# Altium PCB MB525.PCBDOC (part 3 of 3)
Units mil, origin at the board's own origin, x right, y up, seen from the top; angles counter-clockwise.
Board outline 4505 x 6805 mil, 4 copper layers (TopLayer, GND, VCC, BottomLayer); 281 components, 230 nets, 1107 pads, 580 vias.
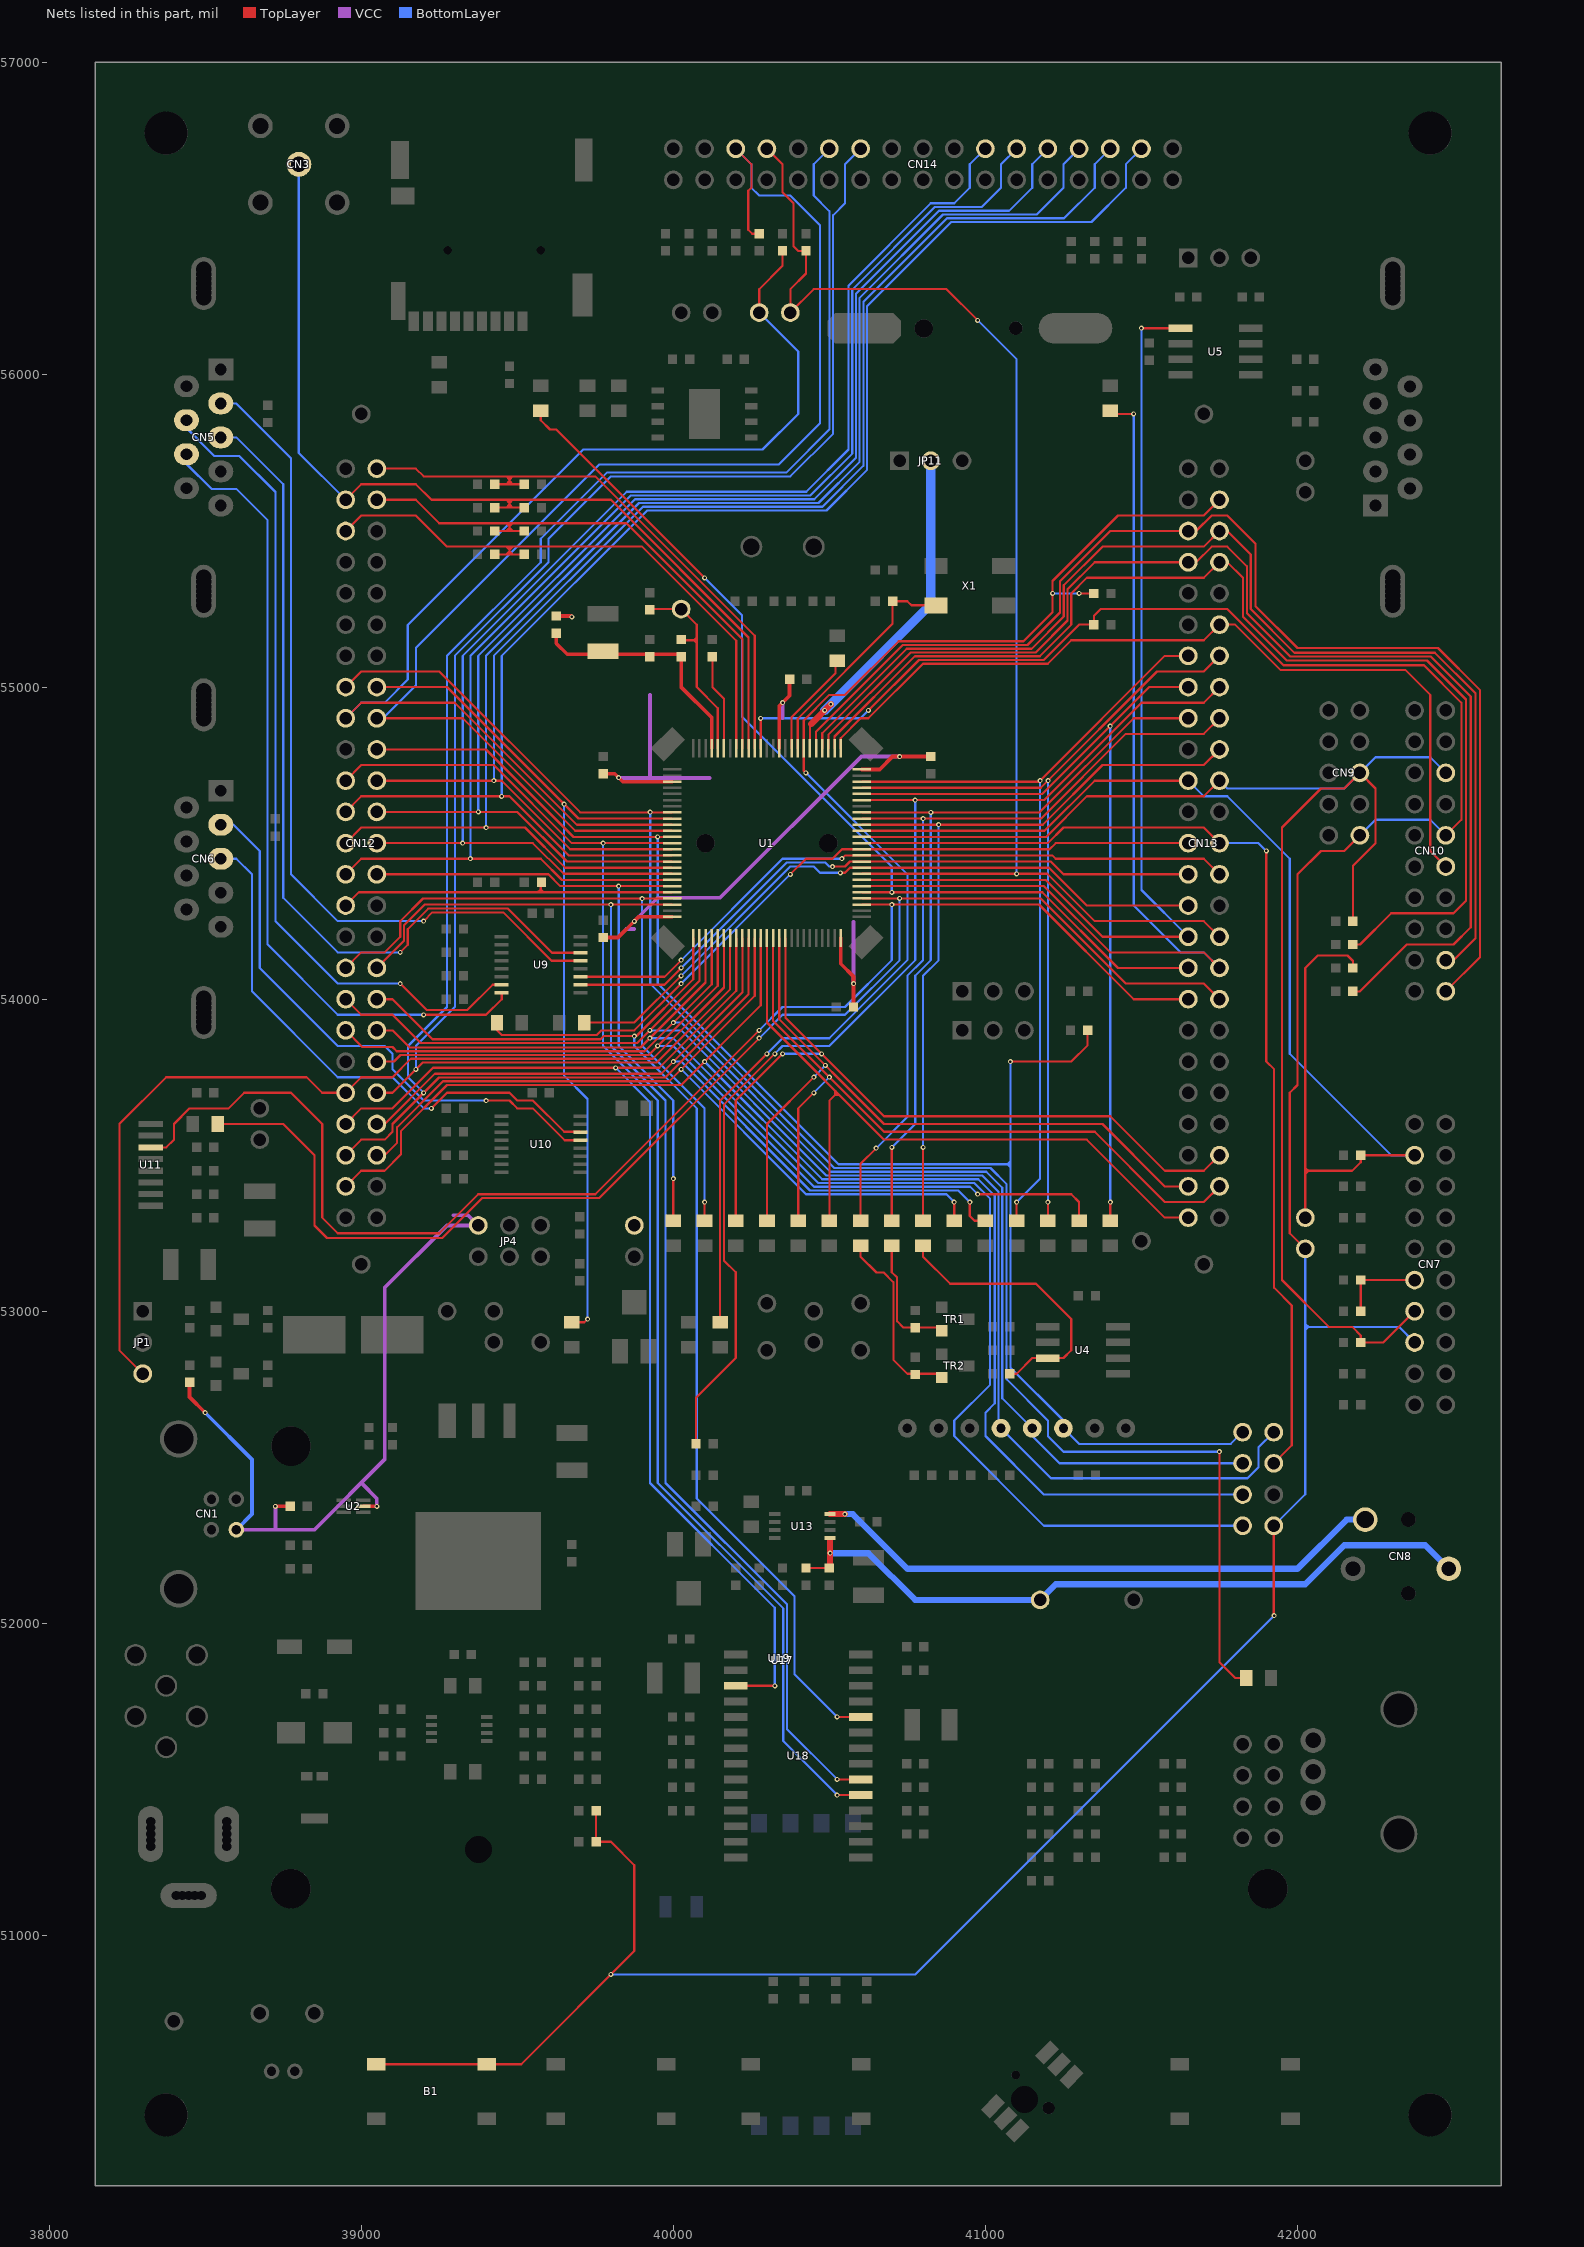
[diagram p5: the nets of this part, all layers, seen from the top]

## Via types
v1: diameter 16, hole 8, TopLayer to BottomLayer, 577 vias
v2: diameter 50, hole 28, TopLayer to BottomLayer, 3 vias

## Nets (pads, with @x,y where several pads share a name; then routed paths per layer and width w, separated by ;. In a path a pad name is that pad's centre, name@x,y a point inside that pad or via, vN(x,y) a via of type N, cw(c..) or ccw(c..) an arc to the next point about the centre after c; other vN are vias at no path point) (continued)
PB0: C76.2 CN12.17 JP8.2 U1.35 | length 3790.2
  TopLayer w7: CN12.17@38950,54900 39000,54950 39300,54950 39690.94,54559.06 U1.35@39995.87,54559.06 ; JP8.2@40275,56200 40275,56275 40350,56350 C76.2@40350,56397.5
  BottomLayer w7: CN12.17@38950,54900 39000,54950 39075,54950 39149,55024 39149,55199 39711,55761 40286,55761 40400,55875 40400,56075 JP8.2@40275,56200
PB1: C72.2 CN12.18 CN14.29 U1.36 | length 4352.4
  TopLayer w7: CN12.18@39050,54900 39325,54900 39685.63,54539.37 U1.36@39995.87,54539.37 ; CN14.29@40200,56725 40250,56675 40250,56600 40240,56590 40240,56465 40252.5,56452.5 C72.2@40275,56452.5
  BottomLayer w7: CN12.18@39050,54900 39070,54900 39175,55005 39175,55125 39763,55713 40338,55713 40470,55845 40470,56480 40375,56575 40275,56575 40250,56600 40250,56675 CN14.29@40200,56725
PB2: CN12.20 R86.1 U1.37 U17.1 U19.6 | length 5100.6
  TopLayer w7: CN12.20@39050,54800 39400,54800 39680.32,54519.68 U1.37@39995.87,54519.68 U1.37@39995.55,54520 ; v1(41080,53800) 41275,53800 41327.5,53852.5 R86.1@41327.5,53900
  BottomLayer w7: v1(39950,54520) 39950,54050 40529,53471 41079,53471 ; 41070,53471 41080,53461 ; 41071,53471 41080,53480 ; v1(41080,53800) 41080,52820 41250,52650 U19.6@41250,52625 41300,52575 41786.22,52575 U17.1@41823.94,52612.72
PB3: CN7.13 CN9.6 CN10.6 CN13.22 R103.1 R129.2 U1.89 | length 4878.7
  TopLayer w7: U1.89@40604.13,54519.68 41194.68,54519.68 41325,54650 41700,54650 CN13.22@41750,54700 ; R129.2@42177.5,54250 42177.5,54427.5 42250,54500 42250,54675 CN9.6@42200,54725 42150,54675 42075,54675 41950,54550 41950,53100 42100,52950 42175,52950 42202.5,52922.5 R103.1@42202.5,52900 42275,52900 CN7.13@42375,53000
  BottomLayer w7: CN13.22@41750,54700 41775,54675 42150,54675 42250,54775 42425,54775 CN10.6@42475,54725
PB4: CN7.3 CN13.21 JP10.1 R122.1 R130.2 U1.90 | length 4136.6
  TopLayer w7: U1.90@40604.13,54539.37 41189.37,54539.37 41350,54700 CN13.21@41675,54700 ; JP10.1@42025,53300 42025,54100 42065,54140 42160,54140 42177.5,54122.5 R130.2@42177.5,54100 ; 42025,53440 42035,53450 42025,53460 ; 42025,53450 42175,53450 42202.5,53477.5 R122.1@42202.5,53500 CN7.3@42375,53500
  BottomLayer w7: CN13.21@41650,54700 41700,54650 41775,54650 41975,54450 41975,53825 42300,53500 CN7.3@42375,53500
PB5: CN13.20 R112.2 U1.91 | length 2535.4
  TopLayer w7: U1.91@40604.13,54559.06 41184.06,54559.06 41375,54750 41700,54750 CN13.20@41750,54800 ; R112.2@40800,53290 v1(40800,53525)
  BottomLayer w7: v1(40800,53525) 40800,54075 40850,54125 v1(40850,54559.06)
PB6: CN13.18 R113.2 U1.92 | length 2650.5
  TopLayer w7: R113.2@40600,53290 40600,53472.72 v1(40650,53522.72) ; U1.92@40604.13,54578.74 41178.74,54578.74 41450,54850 41700,54850 CN13.18@41750,54900
  BottomLayer w7: v1(40650,53522.72) 40750,53622.72 40750,54075 40800,54125 v1(40800,54578.74)
PB7: CN13.17 R114.2 U1.93 | length 2531
  TopLayer w7: U1.93@40604.13,54598.43 41173.43,54598.43 41475,54900 CN13.17@41650,54900 ; R114.2@40700,53290 v1(40700,53525)
  BottomLayer w7: v1(40700,53525) 40775,53600 40775,54075 40825,54125 v1(40825,54598.43)
PB8: CN13.16 R32.1 U1.95 | length 3769
  TopLayer w7: R32.1@40072.5,52575 40072.5,52722.5 40200,52850 40200,53124.7 40162,53162.7 40162,53662 v1(40325,53825) ; U1.95@40604.13,54637.8 41187.8,54637.8 41500,54950 41700,54950 CN13.16@41750,55000
  BottomLayer w7: v1(40325,53825) 40350,53850 40500,53850 40775,54125 v1(40775,54637.8)
PB9: CN13.15 R78.2 U1.96 | length 2772.7
  TopLayer w7: U1.96@40604.13,54657.48 41182.48,54657.48 41525,55000 CN13.15@41650,55000 ; R78.2@41400,53290 v1(41400,53350)
  BottomLayer w7: v1(41399.92,54874.92) 41400,54874.83 v1(41400,53350)
PB10: CN12.33 R115.2 U1.47 | length 2282.9
  TopLayer w7: CN12.33@38950,54100 39000,54150 39075,54150 39125,54200 39125,54250 39197.83,54322.83 39899.69,54322.83 v1(39900,54322.52) ; v1@39900,54322.83 U1.47@39995.87,54322.83 ; R115.2@40100,53290 v1(40100,53350)
  BottomLayer w7: v1(39900,54322.52) 39900,53850 40100,53650 v1(40100,53350)
PB11: CN12.34 U1.48 U18.20 | length 4239.6
  TopLayer w7: CN12.34@39050,54100 39137,54187 39137,54237 39203.15,54303.15 U1.48@39995.87,54303.15 ; v1(40525,51500) U18.20@40600,51500
  BottomLayer w7: v1@39800,54305 39800,53850 39975,53675 39975,52450 40364,52061 40364,51661 v1(40525,51500)
  other v1: 39800,54303.15
PB12: CN12.36 U1.51 U18.24 | length 3804.7
  TopLayer w7: CN12.36@39050,54000 39100,54000 39228.49,53871.51 39766.51,53871.51 39776.78,53881.78 39881.78,53881.78 40063.78,54063.78 U1.51@40063.78,54195.87 ; v1(40525,51700) U18.24@40600,51700
  BottomLayer w7: v1(39875,53881.78) 39875,53850 40075,53650 40075,52400 40388,52087 40388,51837 v1(40525,51700)
PB13: CN12.35 U1.52 U17.2 U19.4 | length 4542.7
  TopLayer w7: CN12.35@38950,54000 39000,53950 39100,53950 39190.49,53859.51 39884.51,53859.51 40083.46,54058.46 U1.52@40083.46,54195.87
  BottomLayer w7: v1(39925,53900) 40025,53900 40490,53435 40990,53435 41042,53383 41042,52633 41210,52465 41840,52465 41875,52500 41875,52563.78 U17.2@41923.94,52612.72
PB14: CN12.38 U1.53 U17.7 | length 4458.8
  TopLayer w7: CN12.38@39050,53900 39100,53900 39155,53845 39895,53845 40103.15,54053.15 U1.53@40103.15,54195.87
  BottomLayer w7: v1(39925,53875) 40000,53875 40464,53411 40964,53411 41015,53360 41015,52765 40900,52650 40900,52600 41187.28,52312.72 U17.7@41823.94,52312.72
PB15: CN12.37 U1.54 U17.3 U19.5 | length 4256.6
  TopLayer w7: CN12.37@38950,53900 39003,53847 39100,53847 39114,53833 39908,53833 40122.83,54047.83 U1.54@40122.83,54195.87
  BottomLayer w7: v1(40000,53925) 40025,53925 40503,53447 41003,53447 41054,53396 41054,52721 U19.5@41150,52625 41150,52600 41237.28,52512.72 U17.3@41823.94,52512.72
PC0: C51.2 CN12.2 R56.2 U1.15 | length 1969.3
  TopLayer w7: CN12.2@39050,55700 39175,55700 39200,55675 39750,55675 40260.63,55164.37 U1.15@40260.63,54804.13 ; C51.2@39427.5,55650 R56.2@39522.5,55650 ; 39465,55650 39475,55660 39485,55650 ; 39465,55675 39475,55665 39485,55675 ; 39475,55650 39475,55675
PC1: C50.2 CN3.5 CN12.3 R55.1 U1.16 | length 3183.6
  TopLayer w7: CN12.3@38950,55600 39000,55650 39175,55650 39225,55600 39800,55600 40240.94,55159.06 U1.16@40240.94,54804.13 ; C50.2@39427.5,55575 R55.1@39522.5,55575 ; 39465,55575 39475,55585 39485,55575 ; 39465,55600 39475,55590 39485,55600 ; 39475,55575 39475,55600
  BottomLayer w7: CN3.5@38800,56675 38800,55750 CN12.3@38950,55600
PC2: C52.2 CN12.4 R57.1 U1.17 | length 1882.3
  TopLayer w7: CN12.4@39050,55600 39175,55600 39250,55525 39850,55525 40221.26,55153.74 U1.17@40221.26,54804.13 ; C52.2@39427.5,55500 R57.1@39522.5,55500 ; 39465,55500 39475,55510 39485,55500 ; 39465,55525 39475,55515 39485,55525 ; 39475,55500 39475,55525
PC3: C53.2 CN12.5 R58.1 U1.18 | length 1959.5
  TopLayer w7: CN12.5@38950,55500 39000,55550 39175,55550 39275,55450 39900,55450 40201.57,55148.43 U1.18@40201.57,54804.13 ; C53.2@39427.5,55425 R58.1@39522.5,55425 ; 39465,55425 39475,55435 39485,55425 ; 39465,55450 39475,55440 39485,55450 ; 39475,55425 39475,55450
PC4: CN12.15 R80.1 U1.33 | length 5424.6
  TopLayer w7: CN12.15@38950,55000 39000,55050 39250,55050 39701.57,54598.43 U1.33@39995.87,54598.43 ; v1(41750,52550) 41750,51875 41800,51825 R80.1@41835,51825
  BottomLayer w7: v1(39926.02,54598.98) 39926.02,54048.98 40516,53459 41016,53459 41068,53407 41068,52782 41200,52650 41200,52600 41250,52550 v1(41750,52550)
PC5: CN12.16 R71.1 U1.34 | length 2855.6
  TopLayer w7: CN12.16@39050,55000 39275,55000 39696.26,54578.74 U1.34@39995.87,54578.74 ; R71.1@39675,52965 39715,52965 v1(39725,52975)
  BottomLayer w7: v1(39650,54625) 39650,53755 39725,53680 v1(39725,52975)
PC6: CN13.49 R8.2 U1.63 | length 2328.8
  TopLayer w7: U1.63@40300,54195.87 40300,53925 40675,53550 41325,53550 41575,53300 CN13.49@41650,53300 ; R8.2@40500,53290 40500,53674.43 40525.29,53699.71 ; 40518.01,53706.99 40518.01,53692.44 40518.8,53693.22 40531.78,53693.22 ; 40519.34,53705.66 40519.38,53705.62 ; 40531.82,53693.18 40531.85,53693.15 40531.78,53693.22
PC7: CN13.48 R7.2 U1.64 | length 2458.4
  TopLayer w7: U1.64@40319.69,54195.87 40319.69,53930.31 40675,53575 41350,53575 41575,53350 41700,53350 CN13.48@41750,53400 ; R7.2@40400,53290 40400,53650 v1(40450,53700)
  BottomLayer w7: v1(40450,53700) v1(40500,53750)
PC8: CN13.47 R6.2 U1.65 | length 2368.1
  TopLayer w7: R6.2@40300,53290 40300,53600 v1(40450,53750) ; U1.65@40339.37,54195.87 40339.37,53935.63 40675,53600 41375,53600 41575,53400 CN13.47@41650,53400
  BottomLayer w7: v1(40450,53750) 40487.17,53787.17 v1(40487.17,53787.83)
PC9: CN13.46 R5.2 U1.66 | length 2592.1
  TopLayer w7: R5.2@40200,53290 40200,53675 v1(40350,53825) ; U1.66@40359.06,54195.87 40359.06,53940.94 40675,53625 41400,53625 41575,53450 41700,53450 CN13.46@41750,53500
  BottomLayer w7: v1(40350,53825) v1(40475,53825)
PC10: CN13.35 U1.78 U11.3 | length 4550.8
  TopLayer w7: U11.3@38325,53525.2 38375.2,53525.2 38400,53550 38400,53600 38450,53650 38575,53650 38625,53700 38775,53700 38875,53600 38875,53300 38925,53250 39250,53250 39375,53375 39750,53375 v1(40275,53900) ; U1.78@40604.13,54303.15 41171.85,54303.15 41475,54000 CN13.35@41650,54000
  BottomLayer w7: v1(40275,53900) 40350,53975 40550,53975 40700,54125 v1(40700,54303.15)
PC11: CN13.36 R64.2 U1.79 | length 4314.1
  TopLayer w7: R64.2@38540,53600 38750,53600 38850,53500 38850,53275 38890,53235 39259.48,53235 39387.48,53363 39763,53363 v1(40275,53875) ; U1.79@40604.13,54322.83 41177.17,54322.83 41450,54050 41700,54050 CN13.36@41750,54000
  BottomLayer w7: v1(40275,53875) 40350,53950 40550,53950 40725,54125 v1(40725,54322.83)
PC12: CN13.33 R81.2 U1.80 | length 3166.5
  TopLayer w7: R81.2@39575,55885 39575,55855 39604.94,55825.06 39624.94,55825.06 v1(40100,55350) ; U1.80@40604.13,54342.52 41182.48,54342.52 41425,54100 CN13.33@41650,54100
  BottomLayer w7: v1(40100,55350) 40220,55230 40220,54905 40700,54425 v1(40700,54342.52)
PC13: CN13.4 R59.1 R62.2 U1.7 | length 4217.8
  TopLayer w7: R62.2@40150,52965 40150,53675 v1(40300,53825) ; v1(40425,54725) 40418.11,54731.89 40418.11,54893.11 40500,54975 40550,54975 40722,55147 41122,55147 41215,55240 41215,55340 41425,55550 41700,55550 CN13.4@41750,55600 ; v1(41300,55300) R59.1@41347.5,55300
  BottomLayer w7: v1(40300,53825) 40350,53875 40500,53875 40750,54125 40750,54400 v1(40425,54725) ; v1(41215,55300) v1(41300,55300)
PC14: C2.1 U1.8 X1.1 | length 741.4
  TopLayer w7: U1.8@40398.43,54804.13 40398.43,54898.43 40702.5,55202.5 C2.1@40702.5,55275 40750,55275 40762.99,55262.01 X1.1@40841.73,55262.01
PC15: R15.2 U1.9 | length 334.4
  TopLayer w7: U1.9@40378.74,54804.13 40378.74,54903.74 40520,55045 R15.2@40520,55080
PD0: CN13.34 R116.2 U1.81 | length 3262.3
  TopLayer w7: U1.81@40604.13,54362.2 41187.8,54362.2 41400,54150 41700,54150 CN13.34@41750,54100 ; R116.2@41400,55875 v1(41475,55875)
  BottomLayer w7: v1(41475,55875) 41475,54300 41625,54150 41700,54150 CN13.34@41750,54100
PD1: CN13.31 U1.82 U5.1 | length 3258.3
  TopLayer w7: U1.82@40604.13,54381.89 41193.11,54381.89 41375,54200 CN13.31@41650,54200 ; v1(41500,56150) U5.1@41625,56150
  BottomLayer w7: v1(41500,56150) 41500,54350 CN13.31@41650,54200
PD2: C75.2 CN13.32 CN14.27 JP8.1 U1.83 | length 4339.2
  TopLayer w7: CN14.27@40300,56725 40350,56675 40350,56585 40385,56550 40385,56412.5 40400,56397.5 C75.2@40425,56397.5 40425,56325 40375,56275 JP8.1@40375,56200 40450,56275 40875,56275 v1(40975,56175) ; U1.83@40604.13,54401.57 41198.43,54401.57 41350,54250 41700,54250 CN13.32@41750,54200
  BottomLayer w7: v1(40975,56175) 41100,56050 v1(41100,54401.57)
PD3: CN13.29 R79.2 U1.84 | length 2207.4
  TopLayer w7: R79.2@39715,53925 39875,53925 v1(40025,54075) ; v1(40535,54405) 40550,54405 40566.26,54421.26 41203.74,54421.26 41325,54300 CN13.29@41650,54300
  BottomLayer w7: v1(40025,54075) 40375,54425 40450,54425 40470,54405 v1(40535,54405)
PD4: CN13.27 U1.85 U9.10 | length 2139.2
  TopLayer w7: U9.10@39701.97,54046.46 39971.46,54046.46 v1(40025,54100) ; v1(40510,54425) 40550,54425 40565.94,54440.94 41209.06,54440.94 41250,54400 CN13.27@41650,54400
  BottomLayer w7: v1(40025,54100) 40363,54438 40487,54438 40500,54425 v1(40510,54425)
PD5: CN13.28 U1.86 U9.11 | length 2234.1
  TopLayer w7: U9.11@39701.97,54072.05 39972.05,54072.05 v1(40025,54125) ; v1(40540,54450) 40550.63,54460.63 41214.37,54460.63 41225,54450 41700,54450 CN13.28@41750,54400
  BottomLayer w7: v1(40025,54125) 40350,54450 v1(40540,54450)
PD6: CN13.25 R77.2 U1.87 | length 2501
  TopLayer w7: R77.2@39435,53925 39435,53900 39450,53885 39755,53885 39770,53900 39875,53900 v1(40025,54050) ; v1(40375,54400) 40425,54450 40510,54450 40540.32,54480.32 41205.32,54480.32 41225,54500 CN13.25@41650,54500
  BottomLayer w7: v1(40025,54050) v1(40375,54400)
PD7: CN13.26 U1.88 U17.4 | length 3367.6
  TopLayer w7: U1.88@40604.13,54500 41200,54500 41250,54550 41700,54550 CN13.26@41750,54500 ; v1(41900,54475) 41900,53800 41925,53775 41925,53075 41981.64,53018.36 41981.64,52570.42 U17.4@41923.94,52512.72
  BottomLayer w7: CN13.26@41750,54500 41875,54500 v1(41900,54475)
PD8: CN12.40 R76.2 U1.55 | length 2964.8
  TopLayer w7: CN12.40@39050,53800 39105,53800 39126,53821 39921,53821 40142.52,54042.52 U1.55@40142.52,54195.87 ; CN12.40@39050,53810 CN12.40@39051,53809 ; v1(40975,53375) 41275,53375 41300,53350 R76.2@41300,53290
  BottomLayer w7: v1(39950.03,53850.03) 39999.97,53850.03 40451,53399 40951,53399 v1(40975,53375)
PD9: CN12.41 JP1.3 U1.56 | length 3149.4
  TopLayer w7: JP1.3@38300,52800 38225,52875 38225,53600 38375,53750 38825,53750 38875,53700 CN12.41@38950,53700 39000,53750 39100,53750 39159,53809 39934,53809 40162.2,54037.2 U1.56@40162.2,54195.87
PD10: CN12.42 CN14.21 U1.57 | length 5310.4
  TopLayer w7: CN12.42@39050,53700 39100,53700 39197,53797 39947,53797 40181.89,54031.89 U1.57@40181.89,54195.87
  BottomLayer w7: v1(39175,53775) 39175,53850 39300,53975 39300,55100 39600,55400 39600,55475 39800,55675 40375,55675 40512,55812 40512,56512 40550,56550 40550,56675 CN14.21@40600,56725
PD11: CN12.43 U1.58 U18.3 | length 3913.8
  TopLayer w7: CN12.43@38950,53600 39000,53650 39100,53650 39230,53780 39955,53780 40201.57,54026.57 U1.58@40201.57,54195.87 ; U18.3@40200,51800 v1(40325,51800)
  BottomLayer w7: v1(39815,53780) 39925,53670 39925,52450 40325,52050 v1(40325,51800)
PD12: CN12.44 R72.2 U1.59 | length 2758
  TopLayer w7: CN12.44@39050,53600 39075,53600 39236,53761 39961,53761 40221.26,54021.26 U1.59@40221.26,54195.87 ; v1(40950,53350) 40950,53305 40965,53290 R72.2@41000,53290
  BottomLayer w7: v1(40000,53800) 40025,53800 40438,53387 40913,53387 v1(40950,53350)
PD13: CN12.45 CN14.23 U1.60 | length 5682.4
  TopLayer w7: CN12.45@38950,53500 39000,53550 39075,53550 39100,53575 39100,53600 39249,53749 39974,53749 40240.94,54015.94 U1.60@40240.94,54195.87
  BottomLayer w7: v1(39200,53700) 39150,53750 39150,53850 39275,53975 39275,55100 39575,55400 39575,55475 39788,55688 40363,55688 40500,55825 40500,56525 40450,56575 40450,56675 CN14.23@40500,56725
PD14: CN12.46 R73.2 U1.61 | length 2747.7
  TopLayer w7: CN12.46@39050,53500 39075,53500 39115,53540 39115,53590 39262,53737 39987,53737 40260.63,54010.63 U1.61@40260.63,54195.87 ; R73.2@40900,53290 v1(40900,53350)
  BottomLayer w7: v1(40025,53775) 40425,53375 40875,53375 v1(40900,53350)
PD15: CN12.47 U1.62 U17.5 | length 4622.2
  TopLayer w7: CN12.47@38950,53400 39000,53450 39075,53450 39127,53502 39127,53577 39275,53725 40025,53725 40280.32,53980.32 U1.62@40280.32,54195.87
  BottomLayer w7: v1(40100,53800) 40477,53423 40977,53423 41030,53370 41030,52705 41000,52675 41000,52600 41187.28,52412.72 U17.5@41823.94,52412.72
PE0: CN13.14 R75.2 U1.97 | length 2731.8
  TopLayer w7: U1.97@40604.13,54677.17 41177.17,54677.17 41550,55050 41700,55050 CN13.14@41750,55100 ; R75.2@41200,53290 v1(41200,53350)
  BottomLayer w7: v1(41200,53350) 41200,54700 v1(41200.56,54700.56)
PE1: CN13.13 R74.2 U1.98 | length 2653.9
  TopLayer w7: U1.98@40604.13,54696.85 41171.85,54696.85 41575,55100 CN13.13@41650,55100 ; R74.2@41100,53290 v1(41100,53350)
  BottomLayer w7: v1(41100,53350) 41175,53425 v1(41175,54700)
PE2: CN10.12 CN13.12 U1.1 | length 2735.5
  TopLayer w7: U1.1@40536.22,54804.13 40536.22,54836.22 40600,54900 40625,54900 40800,55075 41200,55075 41275,55150 41700,55150 CN13.12@41750,55200 41800,55200 41945,55055 42345,55055 42425,54975 42425,54475 CN10.12@42475,54425
PE3: CN13.8 R124.2 U1.2 | length 3671.7
  TopLayer w7: U1.2@40516.54,54804.13 40516.54,54841.54 40774,55099 41174,55099 41275,55200 41275,55300 41325,55350 41700,55350 CN13.8@41750,55400 41775,55400 41825,55350 41825,55225 41965,55085 42415,55085 42540,54960 42540,54315 42500,54275 42300,54275 42200,54175 R124.2@42177.5,54175
PE4: CN13.7 R125.2 U1.3 | length 3898.4
  TopLayer w7: U1.3@40496.85,54804.13 40496.85,54846.85 40761,55111 41161,55111 41263,55213 41263,55313 41350,55400 41675,55400 41725,55450 41775,55450 41837.77,55387.23 41837.77,55237.23 41977,55098 42427,55098 42555,54970 42555,54230 42500,54175 42350,54175 42200,54025 R125.2@42177.5,54025
PE5: CN10.18 CN13.6 U1.4 | length 3694.7
  TopLayer w7: U1.4@40477.17,54804.13 40477.17,54852.17 40748,55123 41148,55123 41251,55226 41251,55326 41375,55450 41700,55450 CN13.6@41750,55500 41775,55500 41850,55425 41850,55250 41990,55110 42440,55110 42570,54980 42570,54195 42500,54125 CN10.18@42475,54125
PE6: CN10.20 CN13.5 U1.5 | length 3886
  TopLayer w7: U1.5@40457.48,54804.13 40457.48,54857.48 40735,55135 41135,55135 41239,55239 41239,55339 41400,55500 41675,55500 41725,55550 41775,55550 41865,55460 41865,55260 42000,55125 42450,55125 42585,54990 42585,54135 CN10.20@42475,54025
PE7: CN12.21 U1.38 U18.19 | length 4605.8
  TopLayer w7: CN12.21@38950,54700 39000,54750 39425,54750 39675,54500 U1.38@39995.87,54500 ; v1(40525,51450) U18.19@40600,51450
  BottomLayer w7: v1(39775,54500) 39775,53850 39950,53675 39950,52450 40352,52048 40352,51623 v1(40525,51450)
PE8: CN12.22 CN14.5 U1.39 | length 4436.4
  TopLayer w7: CN12.22@39050,54700 39450,54700 39669.68,54480.32 U1.39@39995.87,54480.32
  BottomLayer w7: v1(39425,54700) 39425,55100 39903,55578 40478,55578 40609,55709 40609,56234 40877,56502 41252,56502 41350,56600 41350,56675 CN14.5@41400,56725
PE9: CN12.23 CN14.3 U1.40 | length 4669.6
  TopLayer w7: CN12.23@38950,54600 39000,54650 39475,54650 39664.37,54460.63 U1.40@39995.87,54460.63
  BottomLayer w7: v1(39450,54650) 39450,55100 39916,55566 40491,55566 40621,55696 40621,56221 40890,56490 41340,56490 41450,56600 41450,56675 CN14.3@41500,56725
PE10: CN12.24 CN14.9 U1.41 | length 4361.3
  TopLayer w7: CN12.24@39050,54600 39500,54600 39659.06,54440.94 U1.41@39995.87,54440.94
  BottomLayer w7: v1(39375,54600) 39375,55100 39877,55602 40452,55602 40585,55735 40585,56260 40851,56526 41076,56526 41150,56600 41150,56675 CN14.9@41200,56725
PE11: CN12.25 CN14.7 U1.42 | length 4594.5
  TopLayer w7: CN12.25@38950,54500 39000,54550 39525,54550 39653.74,54421.26 U1.42@39995.87,54421.26
  BottomLayer w7: v1(39400,54550) 39400,55100 39890,55590 40465,55590 40597,55722 40597,56247 40864,56514 41164,56514 41250,56600 41250,56675 CN14.7@41300,56725
PE12: CN12.26 CN14.13 U1.43 | length 4286.2
  TopLayer w7: CN12.26@39050,54500 39550,54500 39648.43,54401.57 U1.43@39995.87,54401.57
  BottomLayer w7: v1(39325,54500) 39325,55100 39851,55626 40426,55626 40561,55761 40561,56286 40825,56550 40900,56550 40950,56600 40950,56675 CN14.13@41000,56725
PE13: CN12.27 CN14.11 U1.44 | length 4519.4
  TopLayer w7: CN12.27@38950,54400 39000,54450 39575,54450 39643.11,54381.89 U1.44@39995.87,54381.89
  BottomLayer w7: v1(39350,54450) 39350,55100 39864,55614 40439,55614 40573,55748 40573,56273 40838,56538 40988,56538 41050,56600 41050,56675 CN14.11@41100,56725
PE14: CN12.28 R117.1 U1.45 | length 2106.2
  TopLayer w7: CN12.28@39050,54400 39600,54400 39637.8,54362.2 U1.45@39995.87,54362.2 ; R117.1@40000,53290 v1(40000,53425)
  BottomLayer w7: v1(39825,54362.2) 39825,53850 40000,53675 v1(40000,53425)
PE15: CN12.29 R53.2 U1.46 | length 1121.7
  TopLayer w7: CN12.29@38950,54300 38992.52,54342.52 U1.46@39995.87,54342.52 ; 39565,54342.52 39575,54352.52 39585,54342.52 ; 39575,54342.52 R53.2@39575,54372.5
RESET#: B1.2 B1.3 C5.2 CN7.15 CN9.10 CN10.10 JP10.2 R2.1 R60.2 U1.14 U17.8 | length 10594.8
  TopLayer w7: B1.2@39047.83,50587.5 39512.5,50587.5 39875,50950 39875,51225 39800,51300 R2.1@39752.5,51300 C5.2@39752.5,51400 ; v1(40280,54900) 40280.32,54899.68 U1.14@40280.32,54804.13 ; v1(40625,54925) 40787,55087 41187,55087 41300,55200 R60.2@41347.5,55200 41347.5,55227.5 41370,55250 41775,55250 41955,55070 42405,55070 42525,54950 42525,54575 CN10.10@42475,54525 ; U17.8@41923.94,52312.72 41923.94,52026.06 v1(41925,52025) ; JP10.2@42025,53200 41975,53250 41975,53700 42000,53725 42000,54400 42075,54475 42150,54475 CN9.10@42200,54525
  BottomLayer w7: v1(39800,50875) 40775,50875 v1(41925,52025) ; v1(40280,54900) 40600,54900 v1(40625,54925) ; U17.8@41923.94,52312.72 42025,52413.78 JP10.2@42025,53200 ; 42025,52940 42035,52950 42025,52960 ; 42025,52950 42325,52950 CN7.15@42375,52900 ; CN9.10@42200,54525 42250,54575 42425,54575 CN10.10@42475,54525
RS232_CTS2: CN5.8 U9.8 | length 2610.3
  TopLayer w7: v1(39200,53950) 39400,53950 39450,54000 U9.8@39450,54020.87
  BottomLayer w7: CN5.8@38440,55746 38440,55715 38520,55635 38600,55635 38700,55535 38700,54175 38925,53950 v1(39200,53950)
RS232_RTS2: CN5.7 U9.7 | length 2646.7
  TopLayer w7: v1(39125,54050) 39210,53965 39340,53965 39421.46,54046.46 U9.7@39450,54046.46
  BottomLayer w7: CN5.7@38440,55855 38440,55830 38530,55740 38610,55740 38725,55625 38725,54250 38925,54050 v1(39125,54050)
RS232_RX1: CN6.2 U10.13 | length 1819.6
  TopLayer w7: v1(39400,53675) 39475,53675 39500,53650 39550,53650 39651.77,53548.23 U10.13@39701.97,53548.23
  BottomLayer w7: CN6.2@38550,54559 38591,54559 38675,54475 38675,54100 38925,53850 39075,53850 39100,53825 39100,53775 39200,53675 v1(39400,53675)
RS232_RX2: CN5.2 U9.13 | length 2685.7
  TopLayer w7: v1(39200,54250) 39228,54278 39455,54278 39609.77,54123.23 U9.13@39701.97,54123.23
  BottomLayer w7: CN5.2@38560,55909 38599,55909 38775,55733 38775,54400 38925,54250 v1(39200,54250)
RS232_TX1: CN6.3 U10.14 | length 1774.3
  TopLayer w7: v1(39225,53650) 39275,53700 39475,53700 39500,53675 39550,53675 39650,53575 U10.14@39700.79,53575
  BottomLayer w7: CN6.3@38550,54450 38600,54450 38650,54400 38650,54025 38925,53750 39100,53750 39200,53650 v1(39225,53650)
RS232_TX2: CN5.3 U9.14 | length 2759
  TopLayer w7: v1(39125,54150) 39149,54174 39149,54224 39215,54290 39470,54290 39611.18,54148.82 U9.14@39701.97,54148.82 U9.14@39700.79,54150
  BottomLayer w7: CN5.3@38550,55800 38600,55800 38750,55650 38750,54325 38925,54150 v1(39125,54150)
RTCK: CN7.11 R105.1 R109.2 | length 272.5
  TopLayer w7: R109.2@42202.5,53000 R105.1@42202.5,53100 CN7.11@42375,53100
SPEAKER+: CN8.2 U13.8 | length 1852.5
  TopLayer w20: U13.8@40502.17,52350 v1(40550,52350)
  BottomLayer w20: v1(40550,52350) 40575,52350 40750,52175 42000,52175 42157.48,52332.48 CN8.2@42216.93,52332.48
SPEAKER-: C31.2 CN8.1 R31.2 U12.2 U13.5 | length 2308.5
  TopLayer w7: C31.2@40425,52177.5 R31.2@40500,52177.5
  TopLayer w20: R31.2@40502.17,52179.67 40502.17,52265
  BottomLayer w20: v1(40502.17,52225) 40625,52225 40775,52075 U12.2@41175.39,52075 41225.39,52125 42025,52125 42150,52250 42409.65,52250 CN8.1@42484.65,52175
TS_INT: R88.1 R112.1 U4.3 | length 921.4
  TopLayer w7: R112.1@40800,53210 40800,53175 40887,53088 41162,53088 41275,52975 41275,52875 41250,52850 41150,52850 41100,52800 R88.1@41077.5,52800
TS_SCL: R89.1 R113.1 TR2.1 | length 590.6
  TopLayer w7: R113.1@40600,53210 40600,53175 40651,53124 40674,53124 40705,53093 40705,52845 40750,52800 TR2.1@40855,52800
TS_SDA: R90.1 R114.1 TR1.1 | length 403
  TopLayer w7: R114.1@40700,53210 40700,53125 40717,53108 40717,52968 40737.5,52947.5 TR1.1@40862.5,52947.5
U5V: C6.2 CN1.1 JP4.2 R13.1 U2.5 | length 2432.8
  TopLayer w12: R13.1@38450,52772.5 38450,52725 v1(38500,52675) ; v1(38725,52375) C6.2@38772.5,52375 ; U2.5@39006.3,52375 v1(39050,52375)
  VCC w12: CN1.1@38600,52300 38850,52300 39075,52525 39075,53075 39275,53275 JP4.2@39375,53275 39342.5,53307.5 39295,53307.5 ; 38725,52300 v1(38725,52375) ; 38999.51,52449.51 39000.49,52449.51 39050,52400 v1(39050,52375)
  BottomLayer w12: v1(38500,52675) 38650,52525 38650,52350 CN1.1@38600,52300
VBAT: JP11.2 U1.6 | length 1104.1
  TopLayer w7: U1.6@40437.8,54804.13 40437.8,54877.8
  TopLayer w20: 40441.61,54881.61 v1(40505,54945)
  BottomLayer w30: v1(40485,54925) v1(40505,54945) 40825,55265 JP11.2@40825,55725
VDD: C57.1 C58.1 C59.1 C60.1 C61.1 JP9.2 L1.1 U1.11 U1.28 U1.50 U1.75 U1.100 | length 3147
  TopLayer w12: L1.1@39625,55227.5 39672.5,55227.5 v1(39675,55225) ; C58.1@39775,54197.5 39822.5,54197.5 v1@39874.8,54249.8 ; C57.1@39775,54722.5 39812.5,54722.5 39838.15,54696.85 U1.28@39995.87,54696.85 ; v1(39875.13,54249.46) 39875.13,54250.13 39888.78,54263.78 U1.50@39995.87,54263.78 ; U1.11@40339.37,54804.13 40339.37,54939.37 v1@40351.21,54951.21 ; v1@40352.5,54952.5 40372.5,54972.5 C61.1@40372.5,55025 ; U1.75@40536.22,54195.87 40536.22,54113.78 40577.5,54072.5 C60.1@40577.5,53975 ; U1.100@40604.13,54736.22 40661.22,54736.22 40702.5,54777.5 C59.1@40825,54777.5
  VCC w12: v1@39826.16,54708.84 40116.58,54708.84 ; 39850,54225 39875,54225 ; v1@39874.67,54249.67 39950,54325 40150,54325 40602.5,54777.5 v1(40725,54777.5) ; 39925,54700 39925,54975 ; 40350,54900 v1(40350,54950) ; v1(40577.5,54050) 40577.5,54247.91
  other v1: 39825,54710
VDDA: C55.1 C56.1 L1.2 R83.2 U1.22 | length 780.9
  TopLayer w12: L1.2@39625,55172.5 39625,55140 39660,55105 R83.2@40025,55105 ; R83.2@40025,55097.5 40025,55000 40122.83,54902.17 U1.22@40122.83,54804.13
VREF+: C77.1 R83.1 TP11.1 U1.21 | length 670.3
  TopLayer w7: C77.1@39925,55250 TP11.1@40025,55250 40075,55200 40075,55000 40142.52,54932.48 U1.21@40142.52,54804.13 ; R83.1@40027.5,55150 40075,55150 ; 40075,55140 40065,55150 40075,55160
VREF-: R84.2 U1.20 | length 308.8
  TopLayer w7: R84.2@40125,55097.5 40125,55000 40162.2,54962.8 U1.20@40162.2,54804.13
pads on no net: BT1.0 CN2.1 CN2.4 CN2.8 CN5.9 CN6.9 CN8.G1 CN8.G2 CN12.31 CN12.32 CN13.2 CN13.3 CN13.23 CN13.24 CN15.0 CN15.1 CN15.8 CN15.9 CN15.10 CN16.6 CN16.G0 U1.0 U1.73 U3.0 U5.5 U10.7 U10.8 U10.9 U10.10 U11.2 U16.0 U17.0 U18.10 U18.25 U19.0 X1.2 X1.3
copper on no net: | length 10145
  TopLayer w7: 39225,51075 39350,51075 ; 39475,50950 39475,51095 ; 39475,51075 39475,51200 ; 39600,50950 39600,51075 39600,51200 ; 39725,50950 39725,51075 39725,51200 ; 39350,50950 39225,50950 39225,51200 39350,51200 ; 39350,50950 39350,51075 ; 39350,50950 39850,50950 39850,51075 ; 39350,51075 39350,51200 ; 39350,51075 39850,51075 ; 39350,51200 39850,51200 39850,51075
  VCC w7: 39225,51075 39850,51075 ; 39350,50950 39350,51200 ; 39475,50950 39475,51200 ; 39600,50950 39600,51200 ; 39725,50950 39725,51200 ; 39225,50950 39850,50950 39850,51200 39225,51200 39225,50950
  BottomLayer w7: 39225,51075 39350,51075 ; 39475,50950 39475,51075 39475,51200 ; 39600,50950 39600,51075 39600,51200 ; 39725,50950 39725,51075 39725,51200 ; 39350,50950 39225,50950 39225,51200 39350,51200 ; 39350,50950 39850,50950 39850,51075 ; 39350,50950 39350,51075 ; 39350,51075 39350,51200 ; 39350,51075 39850,51075 ; 39350,51200 39850,51200 39850,51075

## Polygon pours and split planes (outlines as drawn)
NetC9_2 on TopLayer (hatched 90Degree grid 10 track 15, remove dead copper): 38150,52675 38635,52675 38635,52350 38795,52350 38795,52025 38145,52025 38145,52675
GND on TopLayer (hatched 90Degree grid 25 track 18, remove dead copper): 38150,57000 42650,57000 42650,50200 38150,50200
U5V on VCC (hatched 90Degree grid 10 track 15, remove dead copper): 38550,52175 38975,52175 39100,52300 39125,52325 39125,53075 39300,53250 39425,53250 39425,53315 39400,53340 39255,53340 39025,53110 39025,52475 38900.03,52350.03 38550,52350.03
+5V on VCC (hatched 90Degree grid 10 track 15, remove dead copper): 39290,53285 39650,53285 39650,53075 39350,52775 39350,52175 39625,51900 40650,51900 41100,52350 41100,52800 41050,52850 40975,52850 40950,52875 40950,53025 41000,53075 41450,53075 41450,52425 41375,52350 40750,51725 40700,51675 39675,51675 39350,52000 39225,52000 39225,53240 39270,53285
D5V on VCC (hatched 90Degree grid 10 track 15, remove dead copper): 38950,53370 39100,53370 39175,53445 39525,53445 39525,53100 38825,53100 38700,53225 38700,55775 38825,55900 39675,55900 39950,55625 41300,55625 41700,55225 41700,54725 41550,54725 41450,54825 41450,55175 41200,55425 39925,55425 39625,55725 38950,55725 38900,55675 38900,53425 38950,53375
VDD on VCC (hatched 90Degree grid 10 track 15, remove dead copper): 39850,53225 39950,53225 39975,53250 39975,54075 40025,54125 40325,54125 40418.11,54031.89 40775,54031.89 40775,54975 40700,55050 40025,55050 39775,55300 39625,55300 39625,54800 39750,54675 39750,53330 39850,53230
+3V3 on VCC (hatched 90Degree grid 10 track 15, remove dead copper): 38150,57000 42650,57000 42650,50200 38150,50200
E5V on VCC (hatched 90Degree grid 10 track 15, remove dead copper): 38150,52175 38980,52175 39100,52295 39100,53064.36 39327.57,53291.93 39340,53304.36 39400.64,53365 39620,53365 39620,53190 39600,53170 39375,53170 39225,53020 39225,52000 38700,51475 38150,51475
GND on BottomLayer (hatched 90Degree grid 25 track 18, remove dead copper): 38145,57000 42650,57000 42650,50200 38150,50200 38150,57000

## Keep-outs
KeepOutLayer:
  lines w4: 39225,50950 39350,50950 ; 39225,51075 39350,51075 ; 39225,51200 39350,51200 ; 39475,50950 39475,51075 39475,51200 ; 39600,50950 39600,51075 39600,51200 ; 39725,50950 39725,51075 39725,51200 ; 39350,50950 39850,50950 39850,51075 ; 39350,50950 39350,51075 ; 39350,51075 39350,51200 ; 39350,51075 39850,51075 ; 39350,51200 39850,51200 39850,51075
  lines w5: 38150,50200 42650,50200 42650,57000 38150,57000 38150,50200

## Other copper
TopLayer:
  text "1" at 39400,51100 h50
  text "B" at 39390,50990 h50
VCC:
  text "3" at 39685,51100 h50
  text "B" at 39685,50990 h50
BottomLayer:
  text "4" at 39810,51100 h50
  text "B" at 39810,50990 h50
GND (plane layer: these items are gaps in the copper):
  rectangle: 39475,51200 39600,51225
  rectangle: 39475,50925 39600,50950
  rectangle: 39205,50925 39475,51225
  rectangle: 39600,50925 39870,51225
  lines w4: 39225,50950 39350,50950 ; 39225,51075 39350,51075 ; 39225,51200 39350,51200 ; 39350,51080 39350,51075 ; 39475,50950 39475,51075 ; 39475,51080 39475,51200 ; 39600,50950 39600,51075 39600,51200 ; 39725,50950 39725,51075 39725,51200 ; 39350,50950 39350,51075 ; 39350,50950 39850,50950 39850,51075 ; 39350,51075 39350,51200 ; 39350,51075 39850,51075 ; 39350,51200 39850,51200 39850,51075
  text "2" at 39520,51100 h50
  text "B" at 39520,50990 h50

## Silkscreen, mask and mechanical layers (free items; w line width, h text height)
TopOverlay:
  drawing of 7541 lines, arcs and shapes, not listed
  text "ADC" at 38925,56875 h40
  text "MSD" at 39325,56875 h40
  text "Motor control" at 40000,56875 h40
  text "1" at 41590,56860 h40
  text "USART2" at 38200,56450 h50
  text "1" at 41650,56450 h35
  text "CAN" at 42100,56225 h50 r90
  text "1" at 39515,56085 h40
  text "GND" at 38950,55940 h40
  text "GND" at 41530,55850 h40
  text "1" at 38940,55775 h40
  text "2" at 39040,55775 h40
  text "1" at 41640,55775 h40
  text "2" at 41725,55775 h40
  text "1" at 40640,55700 h35
  text "GND" at 41450,55679 h40
  text "GND" at 38785,55675 h40
  text "PC0" at 39125,55675 h40
  text "VBAT" at 40675,55600 h40
  text "PC1" at 38785,55575 h40
  text "PC2" at 39125,55575 h40
  text "PC13" at 41815,55575 h40
  text "PC3" at 38785,55475 h40
  text "PA0" at 39125,55475 h40
  text "PE6" at 41450,55475 h40
  text "PE5" at 41815,55475 h40
  text "PA1" at 38785,55375 h40
  text "PA2" at 39125,55375 h40
  text "PE4" at 41450,55375 h40
  text "PE3" at 41815,55375 h40
  text "VREF" at 39980,55310 h40
  text "PA3" at 38785,55275 h40
  text "GND" at 39125,55275 h40
  text "PC13" at 41450,55275 h40
  text "GND" at 41815,55275 h40
  text "PA4" at 38785,55175 h40
  text "PA5" at 39125,55175 h40
  text "RST" at 41450,55175 h40
  text "PE2" at 41815,55175 h40
  text "USART1" at 38200,55100 h50
  text "PA6" at 38785,55080 h40
  text "PA7" at 39125,55075 h40
  text "PE1" at 41450,55075 h40
  text "PE0" at 41815,55075 h40
  text "PC4" at 38785,54975 h40
  text "PC5" at 39125,54975 h40
  text "pin1" at 40605,54975 h40 r90
  text "PB9" at 41450,54975 h40
  text "PB8" at 41815,54975 h40
  text "PB0" at 38785,54875 h40
  text "PB1" at 39125,54875 h40
  text "PB7" at 41450,54875 h40
  text "PB6" at 41815,54875 h40
  text "GND" at 38785,54775 h40
  text "PB2" at 39125,54775 h40
  text "D5V" at 41450,54775 h40
  text "PB5" at 41815,54775 h40
  text "PE7" at 38785,54675 h40
  text "PE8" at 39125,54675 h40
  text "PB4" at 41450,54675 h40
  text "PB3" at 41815,54675 h40
  text "PE9" at 38785,54575 h40
  text "PE10" at 39125,54575 h40
  text "SW1" at 40785,54505 h40
  text "SW2" at 40895,54505 h40
  text "Boot Select" at 41040,54505 h40
  text "PE11" at 38760,54475 h40
  text "PE12" at 39125,54475 h40
  text "PD6" at 41450,54475 h40
  text "PD7" at 41815,54475 h40
  text "X" at 40820,54435 h40
  text "0" at 40935,54435 h40
  text "User  Flash" at 41040,54435 h40
  text "PD4" at 41450,54405 h40
  text "PE13" at 38760,54375 h40
  text "PE14" at 39125,54375 h40
  text "PD5" at 41815,54375 h40
  text "0" at 40820,54365 h40
  text "1" at 40940,54360 h40
  text "System memory" at 41040,54360 h40
  text "1" at 40825,54295 h40
  text "1" at 40940,54295 h40
  text "SRAM" at 41040,54295 h40
  text "PE15" at 38760,54275 h40
  text "GND" at 39125,54275 h40
  text "PD3" at 41450,54275 h40
  text "GND" at 41815,54275 h40
  text "Boot Select" at 40898,54213 h36
  text "PD1" at 41450,54175 h40
  text "PD2" at 41815,54175 h40
  text "0" at 40915,54150 h40
  text "1" at 41115,54150 h40
  text "BOOT0" at 41000,54100 h40
  text "PB10" at 38760,54075 h40
  text "PB11" at 39125,54075 h40
  text "PC12" at 41450,54075 h40
  text "PD0" at 41815,54075 h40
  text "PB13" at 38760,53975 h40
  text "PB12" at 39115,53975 h40
  text "PC10" at 41450,53975 h40
  text "PC11" at 41815,53975 h40
  text "PB15" at 38760,53885 h40
  text "PB14" at 39125,53875 h40
  text "PA14" at 41450,53875 h40
  text "PA15" at 41815,53875 h40
  text "BOOT1" at 41000,53785 h40
  text "GND" at 38760,53775 h40
  text "PD8" at 39125,53775 h40
  text "GND" at 41450,53775 h40
  text "PA13" at 41815,53775 h40
  text "PD9" at 38760,53675 h40
  text "PD10" at 39125,53675 h40
  text "PA12" at 41450,53675 h40
  text "PA11" at 41815,53675 h40
  text "PD11" at 38760,53575 h40
  text "PD12" at 39115,53575 h40
  text "PA10" at 41450,53575 h40
  text "PA9" at 41815,53575 h40
  text "USB: USB 5V power source" at 39775,53565 h36
  text "DTB: Daughter Board power source" at 39775,53515 h36
  text "PD13" at 38760,53475 h40
  text "PD14" at 39115,53475 h40
  text "PA8" at 41450,53475 h40
  text "PC9" at 41815,53475 h40
  text "PSU: Power Supply Unit" at 39775,53460 h36
  text "PD15" at 38760,53375 h40
  text "3V3" at 39125,53375 h40
  text "PC8" at 41450,53375 h40
  text "PC7" at 41815,53375 h40
  text "1" at 39345,53350 h35
  text "POWER_SEL" at 39400,53350 h36
  text "GND" at 39125,53275 h40
  text "PC6" at 41450,53275 h40
  text "GND" at 41815,53275 h40
  text "D5V" at 38760,53270 h40
  text "VDD" at 39800,53250 h35 r90
  text "49" at 38900,53200 h40
  text "50" at 39020,53200 h40
  text "49" at 41605,53200 h40
  text "50" at 41720,53200 h40
  text "3V3" at 39800,53125 h35 r90
  text "GND" at 39080,53100 h40
  text "LED_SEL" at 40250,53100 h36
  text "JOY_SEL" at 40945,53100 h36
  text "GND" at 41775,53085 h40
  text "USB" at 39325,53075 h36
  text "DTB" at 39445,53075 h36
  text "PSU" at 39550,53075 h36
  text "5V" at 39170,53015 h35
  text "1" at 38215,52975 h35
  text "3V3" at 40240,52975 h35 r90
  text "MIC" at 39535,52965 h36
  text "Audio" at 40240,52800 h36 r90
  text "Audio" at 39349,52795 h36
  text "Speaker" at 40375,52750 h36
  text "USB" at 38175,52655 h50
  text "Audio JACK" at 42170,51930 h50
  text "S" at 39270,51100 h50
  text "PSU" at 38200,51000 h50
  text "DC5V" at 38435,51000 h50
  text "C" at 39275,50990 h50
  text "-" at 38520,50920 h50
  text "+" at 38255,50915 h50
  text "Rev.B" at 42340,50845 h50
  text "MIC-" at 38625,50825 h36
  text "MIC+" at 38800,50825 h36
  text "GND" at 38250,50700 h35
  text "Microphone" at 38555,50320 h50
BottomOverlay:
  drawing of 656 lines, arcs and shapes, not listed
  text "Rev.B" at 39500,56521 h40
Mechanical1:
  lines w5: 38150,50200 38150,57000 42650,57000 42650,50200 38150,50200

## Text inside footprints (layer, text, board x,y; h text height)
CN16: BottomOverlay "NC" at 40300,50600 h40 r90; BottomOverlay "CLK" at 40400,51250 h40 r90; BottomOverlay "VCC" at 40600,51250 h40 r90; BottomOverlay "NC" at 40300,51250 h40 r90; BottomOverlay "RST" at 40500,51250 h40 r90; BottomOverlay "GND" at 40600,50600 h40 r90; BottomOverlay "NC" at 40500,50600 h40 r90; BottomOverlay "I/O" at 40400,50600 h40 r90
U12: TopOverlay "+" at 41590,52100 h60 r180; TopOverlay "-" at 41105,52100 h60 r180